# EAGLE board ERobot Minimalis - 2023 (EAGLE 9.6.2)
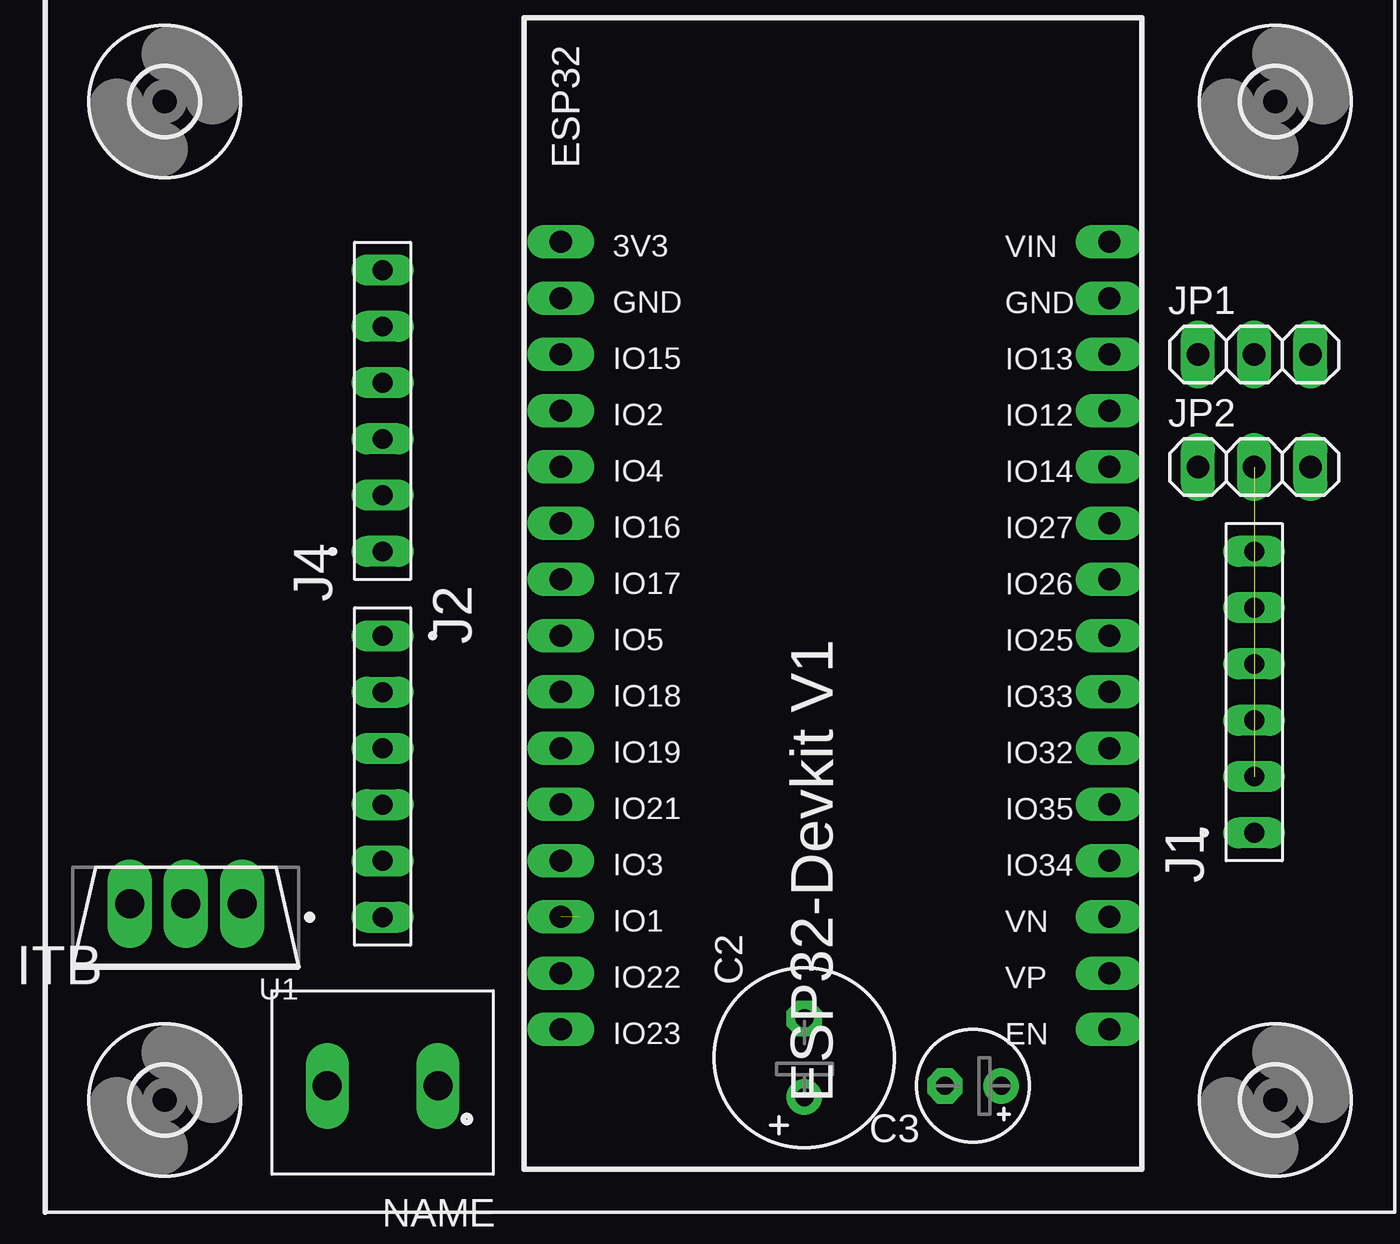
[diagram p0: board, top side]
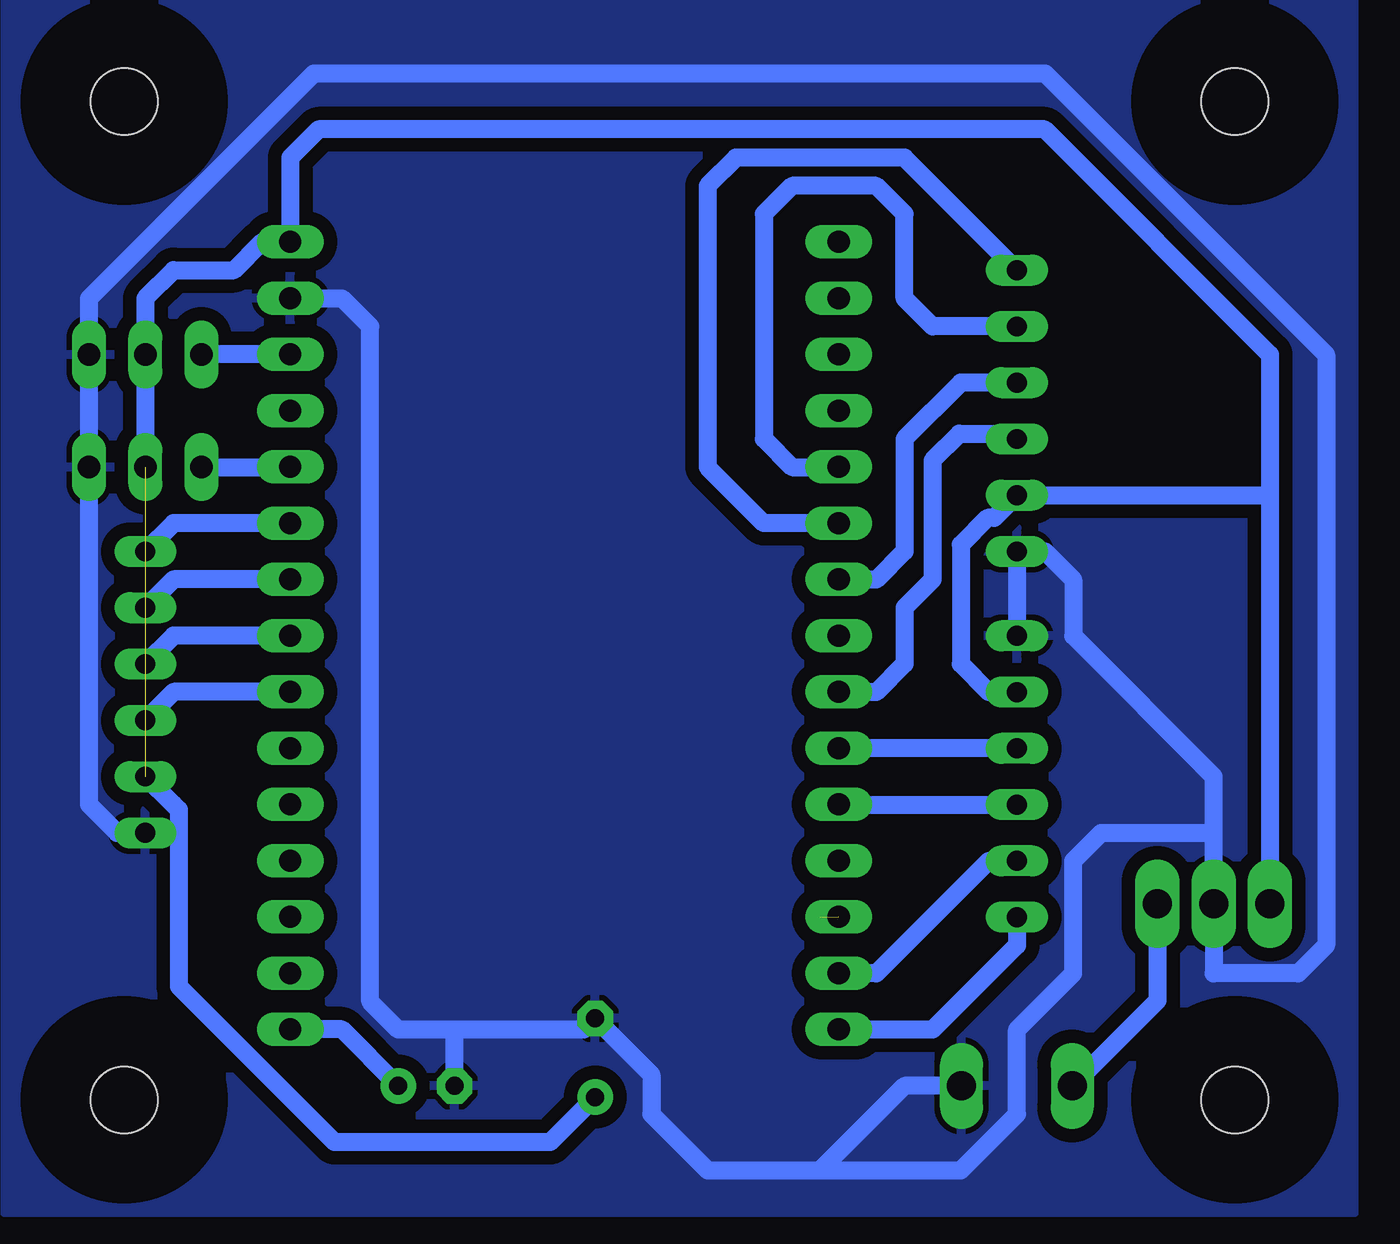
[diagram p1: board, bottom side, seen from below]

No outline drawn. Coordinates in mm, seen from the top.
Copper layers (1*16): Top 0.035mm / dielectric 1.5mm / Bottom 0.035mm
Design rules "default *": minimum track width 6mil, minimum drill 0.35mm, track to track 16mil, track to pad 16mil, pad to pad 16mil, via to via 16mil, smd to smd 16mil, copper to edge 40mil, drill to drill 6mil, minimum pad ring 10mil, minimum via ring 8mil, stop-mask expansion 4mil, vias tented up to drill 0mil, thermal gap 10mil

## Footprints (pad centres in the part's own frame; a part is rotated, then mirrored left to right if it is on the bottom)
E3,5-8 = drill 0.813 pad 1.6: + -1.778,0 | drill 0.813 pad 1.6 octagon: - 1.778,0
E2,5-5 = drill 0.813 pad 1.6: + -1.27,0 | drill 0.813 pad 1.6 octagon: - 1.27,0
ESP32-DEVKITV1 = drill 1 pad 1.422 long: 1 -22.87,-13.54; 2 -20.33,-13.54; 3 -17.79,-13.54; 4 -15.25,-13.54; 5 -12.71,-13.54; 6 -10.17,-13.54; 7 -7.63,-13.54; 8 -5.09,-13.54; 9 -2.55,-13.54; 10 -0.01,-13.54; 11 2.53,-13.54; 12 5.07,-13.54; 13 7.61,-13.54; 14 10.15,-13.54; 15 12.69,-13.54; 16 12.69,11.23; 17 10.15,11.23; 18 7.61,11.23; 19 5.07,11.23; 20 2.53,11.23; 21 -0.01,11.23; 22 -2.55,11.23; 23 -5.09,11.23; 24 -7.63,11.23; 25 -10.17,11.23; 26 -12.71,11.23; 27 -15.25,11.23; 28 -17.79,11.23; 29 -20.33,11.23; 30 -22.87,11.23
TE_215297-6 = drill 0.9 long: 1 -6.35,0; 2 -3.81,0; 3 -1.27,0; 4 1.27,0; 5 3.81,0; 6 6.35,0
PHOENIX_1935161 = drill 1.3 long: 1 -2.5,0; 2 2.5,0
1X03 = drill 1.016 long: 1 -2.54,0; 2 0,0; 3 2.54,0
STMICROELECTRONICS_L7805CV_0 = drill 1.3 pad 2 long: 1 -0.605,2.54; 2 -0.605,0; 3 -0.605,-2.54
3,0 = hole 3: 0,0

## Placement (x,y rotation side)
C2  100u  [E3,5-8]  34.29,7.62 90 top
C3  10u  [E2,5-5]  41.91,6.35 180 top
ESP32  DEVKIT-V1  [ESP32-DEVKITV1]  36.83,21.59 270 top
J1  215297-6  [TE_215297-6]  54.61,24.13 90 top
J2  215297-6  [TE_215297-6]  15.24,20.32 270 top
J3  1935161  [PHOENIX_1935161]  15.24,6.35 180 top
J4  215297-6  [TE_215297-6]  15.24,36.83 90 top
JP1  [1X03]  54.61,39.37 0 top
JP2  [1X03]  54.61,34.29 0 top
U1  STMICROELECTRONICS_L7805CVSTMICROELECTRONICS_L7805CV_0_0  [STMICROELECTRONICS_L7805CV_0]  6.35,13.97 270 top
U$2  [3,0]  55.56,50.8 0 top
U$3  [3,0]  55.56,5.71 0 top
U$4  [3,0]  5.4,5.71 0 top
U$5  [3,0]  5.4,50.8 0 top

## Library data of the parts
C2 C3 = rcl; SPICEPREFIX: C
ESP32 = ESP32-DEVKITV1
J1 J2 J4 = 215297-6; AVAILABILITY: In Stock; COMMENT: 215297-6; DESCRIPTION: Wire-To-Board Connector, Vertical, Ampmodu Hv-100 Series, Through Hole, Receptacle, 6, 2.54 Mm; EU_ROHS_COMPLIANCE: Compliant; MF: TE Connectivity; MP: 215297-6; PACKAGE: None; PRICE: None; PURCHASE-URL: https://pricing.snapeda.com/search/part/215297-6/?ref=eda
J3 = 1935161; AVAILABILITY: In Stock; DESCRIPTION: 2 Position Wire to Board Terminal Block Horizontal with Board 0.197 (5.00mm) Through Hole; MF: Phoenix Contact; MP: 1935161; PACKAGE: None; PRICE: None; PURCHASE-URL: https://pricing.snapeda.com/search/part/1935161/?ref=eda
JP1 JP2 = pinhead
U1 = STMicroelectronics - L7805CV; CENTROID_NOT_SPECIFIED: No; DATASHEET: http://www.st.com/content/ccc/resource/technical/document/datasheet/41/4f/b3/b0/12/d4/47/88/CD00000444.pdf/files/CD00000444.pdf/jcr:content/translations/en.CD00000444.pdf; DIGIKEY_DESCRIPTION: IC REG LINEAR 5V 1.5A TO220AB; DIGIKEY_PART_NUMBER: 497-1443-5-ND; IPC_LAND_PATTERN_NAME: TO-220; LEAD_FREE: yes; MF: STMicroelectronics; MFG_PACKAGE_IDENT: TO-220-3; MOUSER_PART_NUMBER: 511-L7805CV; MPN: L7805CV; PACKAGE: TO-220-3; PREFIX: U; ROHS: yes; TEMPERATURE_RANGE_HIGH: +125°C; TEMPERATURE_RANGE_LOW: 0°C
U$2-U$5 = holes

## Nets
+5V: C2.+ ESP32.30 J1.2 J2.2 J4.2 JP1.2 JP2.2 U1.3
AI0: ESP32.18
AI1: ESP32.17
BI0: ESP32.22 J1.3
CLK: ESP32.9 J4.3
D03: ESP32.24 J1.5
DA2: ESP32.23 J1.4
DI0: ESP32.7 J4.4
DI1: ESP32.21
DI2: ESP32.20
DI3: ESP32.19
DO0: ESP32.27
DO1: ESP32.26 JP2.1
DO2: ESP32.25 J1.6
DO3: ESP32.28 JP1.1
GND: C2.- C3.- ESP32.29 J1.1 J2.1 J3.1 J4.1 JP1.3 JP2.3 U1.2
LED0: ESP32.5 J4.5
LED1: ESP32.6 J4.6
LED2: ESP32.3
MISO: ESP32.10 J2.3
MOSI: ESP32.15 J2.6
N$1: J3.2 U1.1
N$4: C3.+ ESP32.16
RX: ESP32.13
SCL: ESP32.14 J2.5
SDA: ESP32.11 J2.4
SS1: ESP32.8
TX: ESP32.12
VCC: ESP32.1

## Tracks (layer width: path | path; a pad name or v marks a point on that pad's centre or on a via)
+5V  (1 unrouted)
  Bottom 0.813: JP2.2 JP1.2 54.61,41.91 53.33,43.19 50.6,43.19 49.33,44.46 ESP32.30 48.06,48.27 46.79,49.54 13.98,49.54 3.81,39.37 3.81,33.02 | 3.81,33.02 U1.3 | J1.2 53.36,19.07 53.34,19.07 53.09,18.82 53.09,10.84 46.06,3.81 36.32,3.81 C2.+ | 3.81,33.02 J4.2 16.26,32 16.57,32 17.78,30.79 17.78,25.4 16.51,24.13 J2.2
BI0
  Bottom 0.813: ESP32.22 53.33,24.14 J1.3
CLK
  Bottom 0.813: J4.3 15.49,35.81 17.84,35.81 19.05,34.6 19.05,29.21 20.32,27.94 20.32,25.4 21.59,24.13 ESP32.9
D03
  Bottom 0.813: ESP32.24 53.33,29.22 J1.5
DA2
  Bottom 0.813: ESP32.23 53.33,26.68 J1.4
DI0
  Bottom 0.813: J4.4 17.78,38.1 20.32,35.56 20.32,30.48 21.59,29.21 ESP32.7
DO1
  Bottom 0.813: JP2.1 ESP32.26
DO2
  Bottom 0.813: ESP32.25 53.33,31.76 J1.6
DO3
  Bottom 0.813: ESP32.28 JP1.1
GND
  Bottom 0.813: ESP32.29 45.72,41.91 44.45,40.64 44.45,10.16 43.18,8.89 40.64,8.89 | 24.13,2.54 20.32,6.35 J3.1 | J1.1 55.88,17.78 57.15,19.05 JP2.3 JP1.3 57.15,41.91 46.99,52.07 13.97,52.07 1.27,39.37 1.27,12.7 2.54,11.43 6.35,11.43 U1.2 6.35,17.78 | 24.13,2.54 29.21,2.54 31.75,5.08 31.75,6.86 C2.- 34.8,8.89 40.64,8.89 | C3.- 40.64,8.89 | J2.1 J4.1 13.97,30.48 12.7,29.21 12.7,26.67 6.35,20.32 6.35,17.78 | 24.13,2.54 17.78,2.54 15.24,5.08 15.24,8.89 12.7,11.43 12.7,16.51 11.43,17.78 6.35,17.78
  pour Bottom (isolate 0.61): 0,57.15 60.96,57.15 60.96,0.64 0,0.64
LED0
  Bottom 0.813: J4.5 19.05,40.64 20.32,41.91 20.32,45.72 21.59,46.99 25.4,46.99 26.67,45.72 26.67,35.56 25.4,34.29 ESP32.5
LED1
  Bottom 0.813: ESP32.6 26.68,31.76 29.21,34.29 29.21,46.99 27.94,48.26 20.32,48.26 J4.6
MISO
  Bottom 0.813: J2.3 ESP32.10
MOSI
  Bottom 0.813: J2.6 15.24,12.7 19.05,8.89 ESP32.15
N$1
  Bottom 0.813: U1.1 8.89,10.2 J3.2
N$4
  Bottom 0.813: C3.+ 45.73,8.9 ESP32.16
RX  (1 unrouted)
  Bottom 0.813: 24.13,13.97 24.12,13.98
SCL
  Bottom 0.813: ESP32.14 21.59,11.43 16.51,16.51 J2.5
SDA
  Bottom 0.813: ESP32.11 J2.4

## Text on the board
tPlace: 5V DC ! | TF ITB